# Altium PCB PMI_Alim.PcbDoc
Units mil, origin at the board's own origin, x right, y up, seen from the top; angles counter-clockwise.
Board outline 3149.61 x 1574.8 mil, 2 copper layers (Top Layer, Bottom Layer); 24 components, 13 nets, 59 pads, 9 vias.
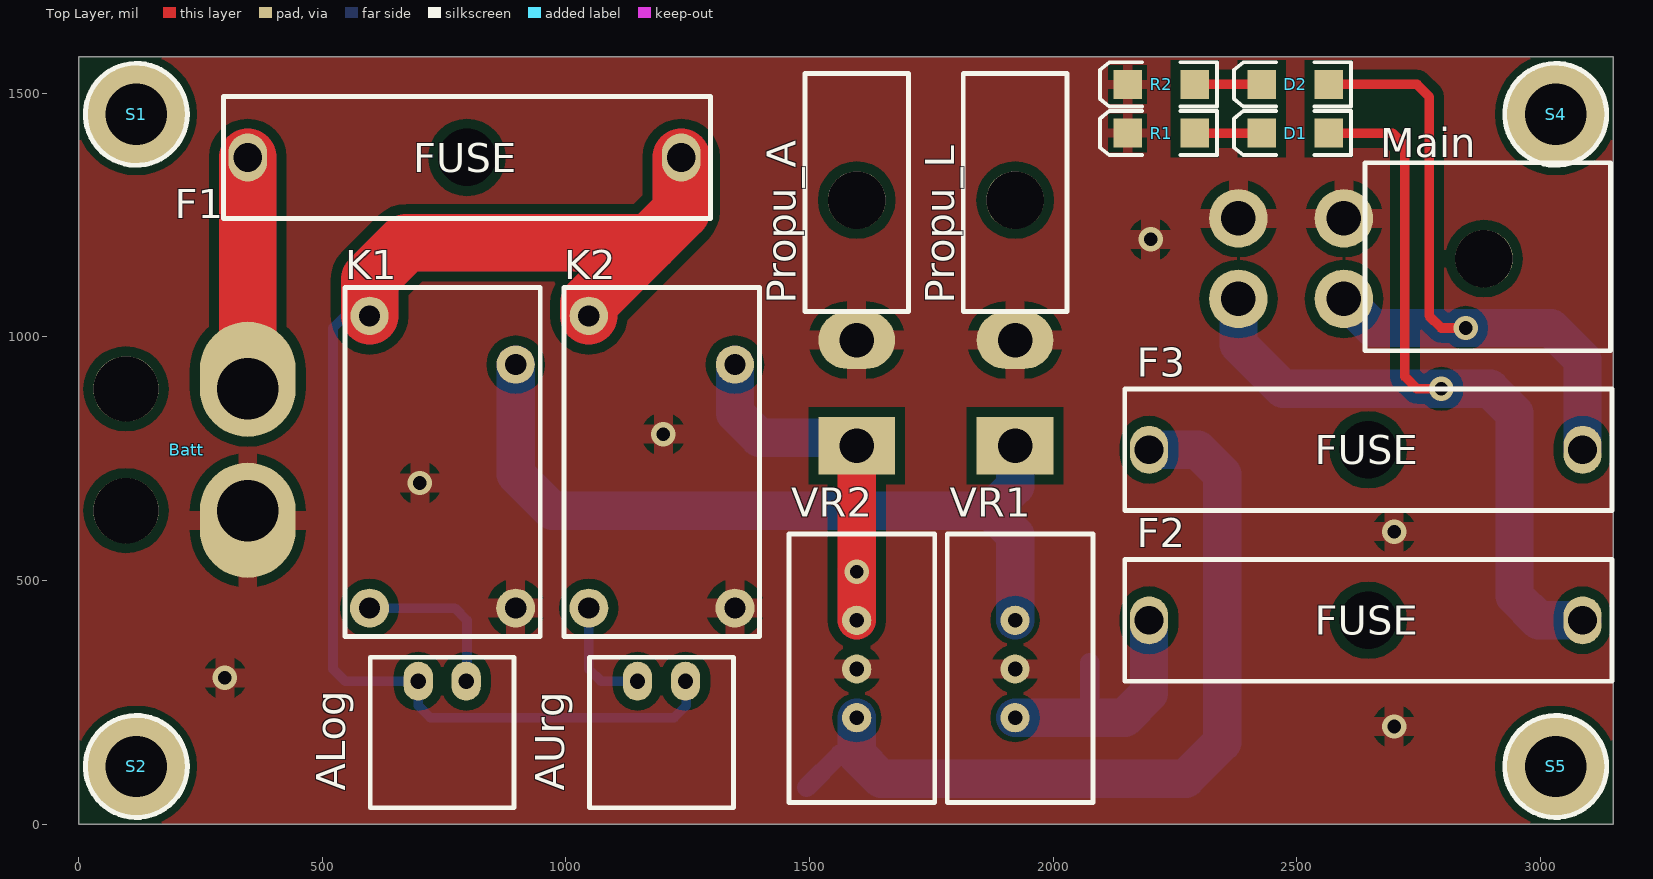
[diagram p0: Top Layer view]
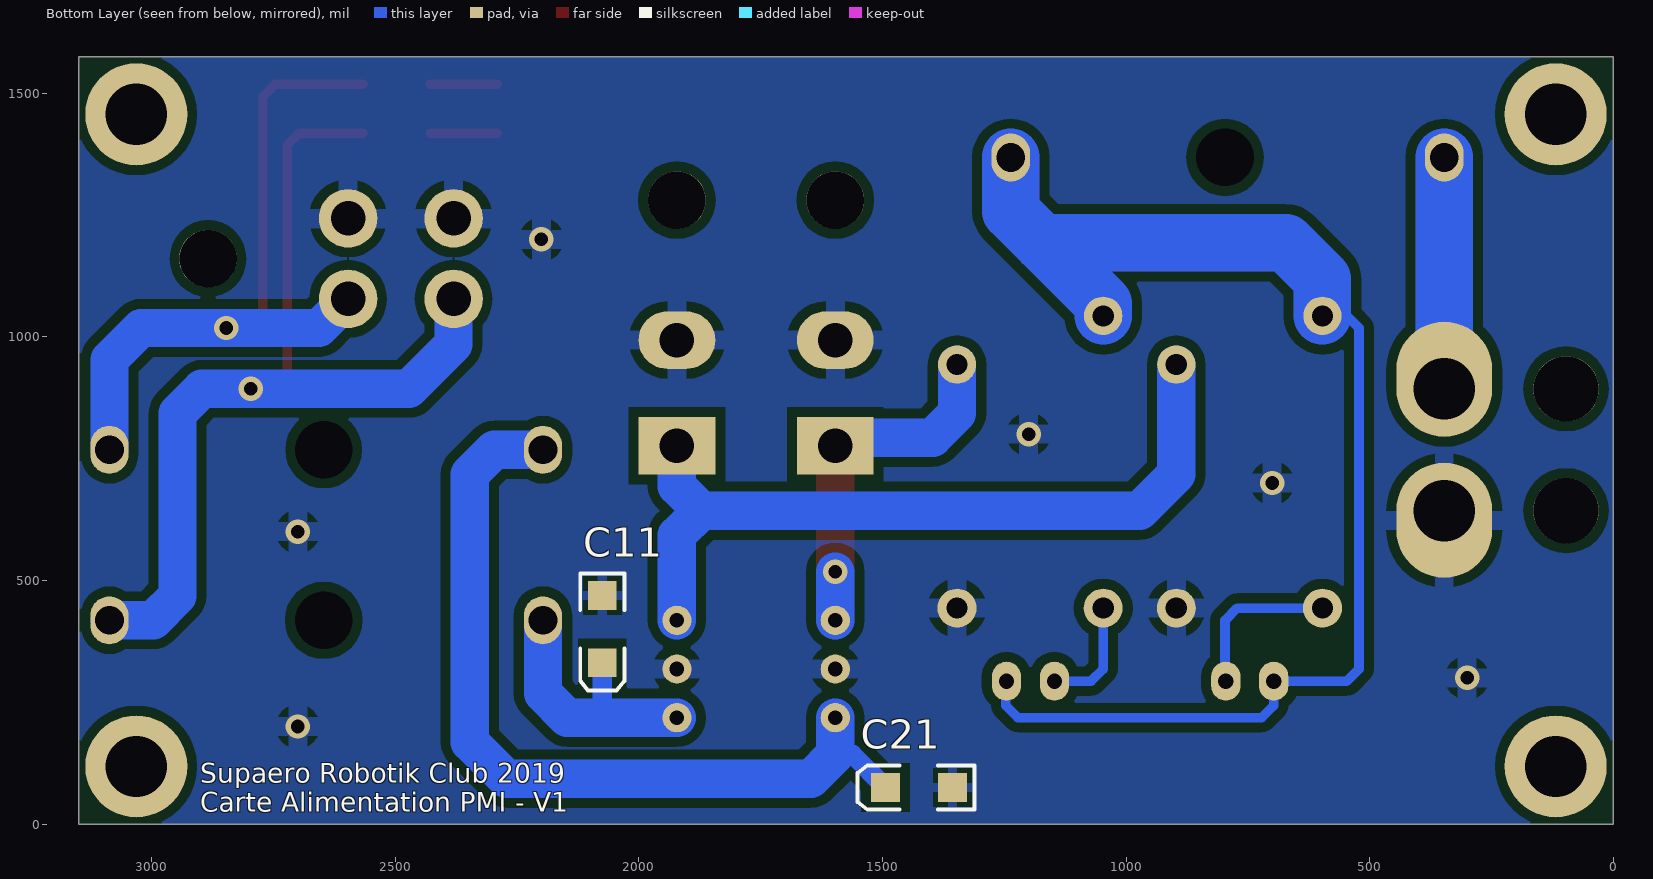
[diagram p1: Bottom Layer view, seen from below]

## Layer stack, top to bottom
Top Solder: solder mask 0.4, Solder Resist, Dk 3.5
Top Layer: signal copper 1.4
Dielectric 1: dielectric 12.6, FR-4, Dk 4.8
Bottom Layer: signal copper 1.4
Bottom Solder: solder mask 0.4, Solder Resist, Dk 3.5

## Board outline
0,0 3149.61,0 3149.61,1574.8 0,1574.8

## Design rules (kind name [scope] priority, off if disabled: settings)
Clearance [All] p1: gap=10 except(20: Arc-Poly Track-Poly SMDPad-Poly THPad-Poly Via-Poly Fill-Poly Poly-Poly Poly-Region Poly-Text)
ComponentClearance CMS_Jr [HasFootprint('MOLEX_MINIFITJR_2X2H') vs HasFootprint('3.2X1.6X1.1')] p1: gap=0 collisioncheckmode=3 verticalgap=0 showdistances=FALSE
ComponentClearance SMDLED [HasFootprint('3.2X1.6X1.1') vs HasFootprint('3.2X1.6X1.1')] p2: gap=0 collisioncheckmode=3 verticalgap=0 showdistances=FALSE
ComponentClearance [All] p3: gap=10 collisioncheckmode=3 verticalgap=10 showdistances=FALSE
PolygonConnect CMS [HasFootprint('3.2X1.6X1.1')] p1: connectstyle=Relief reliefconductorwidth=20 reliefentries=4 polygonreliefangle="90 Angle" airgapwidth=10
PolygonConnect PolygonConnect_1 [All] p2: connectstyle=Relief reliefconductorwidth=40 reliefentries=4 polygonreliefangle="90 Angle" airgapwidth=20
RoutingVias [All] p1: holewidth=28 width=50 viastyle="Through Hole" minholewidth=28 minwidth=50 maxholewidth=28 maxwidth=50
SolderMaskExpansion [All] p1: expansion=4
Width [All] p1: maxlimit=118.11 minlimit=9.84 preferedwidth=39.37
29 further rules are at their usual default settings.

## Components (designator, comment, footprint, x,y, rotation, side; value= is the part's Value field where it differs from the comment)
ALog "Header 2H" "Molex SPOX 2x1H" 696.85,293.11 r0 top
AUrg "Header 2H" "Molex SPOX 2x1H" 1146.85,293.11 r0 top
Batt "Header 2H" "Battery SALE" 346.85,643.11 r90 top
C11 "Cap" 3.2X1.6X1.1 2075,400 r270 bottom
C21 "Cap" 3.2X1.6X1.1 1425,75 r0 bottom
D1 "LED2" 3.2X1.6X1.1 2496.85,1418.11 r180 top
D2 "LED2" 3.2X1.6X1.1 2496.85,1518.11 r180 top
F1 "Fuse 1" Fuse 346.85,1368.11 r0 top
F2 "Fuse 1" Fuse 2196.85,418.11 r0 top
F3 "Fuse 1" Fuse 2196.85,768.11 r0 top
K1 "Relay-SPST" Relay 746.85,743.11 r180 top
K2 "Relay-SPST" Relay 1196.85,743.11 r180 top
Main "Header 2X2H" MOLEX_MINIFITJR_2X2H 2596.85,1243.11 r90 top
Propu_A "Header 2H" Molex_MiniFitJr_2x1H 1596.85,993.11 r90 top
Propu_L "Header 2H" Molex_MiniFitJr_2x1H 1921.85,993.11 r90 top
R1 "Res2" 3.2X1.6X1.1 2221.85,1418.11 r180 top
R2 "Res2" 3.2X1.6X1.1 2221.85,1518.11 r180 top
S1 "Screw M3" "Screw M3" 118.11,1456.69 r0 top
S2 "Screw M3" "Screw M3" 118.11,118.11 r0 top
S3 "Screw M3" "Screw M3" 6146.85,-1356.89 r0 top
S4 "Screw M3" "Screw M3" 3031.5,1456.69 r0 top
S5 "Screw M3" "Screw M3" 3031.5,118.11 r0 top
VR1 "TSR 2-2450" "TRS - centered" 1921.85,418.11 r90 top
VR2 "TSR 2-2490" "TRS - centered" 1596.85,418.11 r90 top

## Footprints (in the part's own frame and the unit in brackets; to place one, negate y for a bottom-side part, rotate by r counter-clockwise, add the part's x,y. Pads: shape width x height; smd on the part's side, far side on the other; paste and mask are expansions set on the pad)
3.2X1.6X1.1 [mm] "SMT LED; 2 Flat Leads"
  rect 1.5x1.5 smd: 1(-1.75,0) 2(1.75,0)
  silkscreen extent -2.9,-1.15 3.2,1.15
"Battery SALE" [mm] "Connecteur Batterie"
  round 3.4 hole 3.4: 0(0,6.35) 0(6.35,6.35)
  oval 6x5 hole 3.2 copper offset -0.5,0: 1(0,0)
  oval 6x5 hole 3.2 copper offset 0.5,0: 2(6.35,0)
Fuse [mm] "Porte-fusible monté sur circuit 10 (UL) A, 6.3 (VDE) A, fusible Cartouche, 893-0574"
  round 2 hole 3: 0(11.43,0)
  oval 2x2.5 hole 1.5: 1(0,0) 2(22.6,0)
  silkscreen extent -1.27,-3.17 24.13,3.17, body extent -1.27,-4.29 24.13,4.29, height 11.41
"Molex SPOX 2x1H" [mil] "Prise CI, Molex, 3 Contacts, 1 rangée, entraxe 2.5mm, 3A, Coudé, ref 22-03-5035"
  oval 60x80 hole 31.5: 1(0,0) 2(98.43,0)
  silkscreen extent -98,-260 197,49, body extent -98,-262 193,49, height 193
Molex_MiniFitJr_2x1H [mm] "Connecteur Molex 2"
  rect 3x4 hole 1.8: 1(-5.5,0)
  oval 3x4 hole 1.8: 2(0,0)
  round 3 hole 3 unplated: 3(7.3,0)
  silkscreen extent 1.5,-2.7 13.9,2.7, body extent -6.03,-2.7 13.9,3.1, height 11.01
MOLEX_MINIFITJR_2X2H [mm] "MOLEX_MINIFITJR_3X2, 39-30-1060"
  round 3.048 hole 1.8: 1(-4.2,5.5) 2(-4.2,0) 3(0,5.5) 4(0,0)
  round 3 hole 3 unplated: 10(-2.1,-7.3)
  silkscreen extent -6.9,-13.9 2.9,-1.1
Relay [mm] "SPST-NO Relay"
  round 2 hole 1.1: 1(3.81,-7.62) 2(-3.81,-5.08)
  round 2.032 hole 1.1: 3(-3.81,7.62) 4(3.81,7.62)
  silkscreen extent -5.09,-9.09 5.09,9.09, body extent -5.08,-9.14 5.08,9.14, height 15
"Screw M3" [mm] "M3 iso Screw"
  round 5.32 hole 3.2 unplated: 0(0,0)
  silkscreen extent -2.66,-2.66 2.66,2.66
"TRS - centered" [mil]
  round 60 hole 30: 1(0,0) 2(-100,0) 3(-200,0)
  silkscreen extent -374,-160 177,139, body extent -374,-157 177,138, height 398

## Part data
ALog AUrg Batt Propu_A Propu_L: "Header, 2-Pin, Right Angle"
C11 C21: "Capacitor"
D1 D2: "Typical RED, GREEN, YELLOW, AMBER GaAs LED"
F1 F2 F3: "Fuse"
K1 K2: "Single-Pole Single-Throw Relay"
Main: "Header, 2-Pin, Dual row, Right Angle"
R1 R2: "Resistor"
VR1 VR2: library part "Volt Reg", "Voltage Regulator"

## Via types
v1: diameter 50, hole 28, Top Layer to Bottom Layer, 9 vias

## Nets (pads, with @x,y where several pads share a name; then routed paths per layer and width w, separated by ;. In a path a pad name is that pad's centre, name@x,y a point inside that pad or via, vN(x,y) a via of type N, cw(c..) or ccw(c..) an arc to the next point about the centre after c; other vN are vias at no path point)
5V_L: D1.1 F2.2 Main.1 | length 1980.6
  Top Layer w19.68: D1.1 2696.85,1418.11 2721.85,1393.11 2721.85,918.11 2746.85,893.11 v1(2796.85,893.11)
  Bottom Layer w78.74: Main.1 2380.31,984.65 2471.85,893.11 2896.85,893.11 2946.85,843.11 2946.85,468.11 2996.85,418.11 F2.2
9V_A: D2.1 F3.2 Main.2 | length 1478.3
  Top Layer w19.68: D2.1 2746.85,1518.11 2771.85,1493.11 2771.85,1043.11 2796.85,1018.11 v1(2846.85,1018.11)
  Bottom Layer w78.74: Main.2 2656.5,1018.11 3021.85,1018.11 3086.61,953.35 F3.2
GND: Batt.1 C11.1 C21.1 K1.3 K2.3 Main.3 Main.4 Propu_A.2 Propu_L.2 R1.2 R2.2 VR1.2 VR2.2
  other v1: 2700,200 300,300 2700,600 700,700 1200,800 2200,1200
NetALog_2: ALog.2 K1.4 | length 333.8
  Bottom Layer w19.68: K1.4 771.85,443.11 796.85,418.11 ALog.2@796.85,294.68
NetAUrg_1: AUrg.1 K2.4 | length 235.4
  Bottom Layer w19.68: K2.4 1046.85,318.11 1071.85,293.11 AUrg.1
NetC11_2: C11.2 F2.1 VR1.3 | length 604.7
  Bottom Layer w39.37: 2025,218.11 2068.11,218.11 2075,225 C11.2
  Bottom Layer w78.74: VR1.3 2025,218.11 2146.85,218.11 2196.85,268.11 F2.1
NetC21_2: C21.2 F3.1 VR2.3 | length 1728.7
  Bottom Layer w39.37: C21.2 1562.01,143.11 1596.85,143.11
  Bottom Layer w78.74: VR2.3 1596.85,143.11 1646.85,93.11 2271.85,93.11 2346.85,168.11 2346.85,718.11 2296.85,768.11 F3.1
NetD1_2: D1.2 R1.1 | length 137.2
  Top Layer w19.68: R1.1 D1.2
NetD2_2: D2.2 R2.1 | length 137.2
  Top Layer w19.68: R2.1 D2.2
V_BAT: Batt.2 F1.1 | length 950
  Top Layer w118.11: Batt.2 F1.1
  Bottom Layer w118.11: Batt.2 F1.1
V_BATA: K2.2 Propu_A.1 VR2.1 | length 836
  Top Layer w78.74: VR2.1 v1(1596.85,518.11) Propu_A.1
  Bottom Layer w78.74: K2.2 1346.85,843.11 1396.85,793.11 1580.31,793.11 Propu_A.1 ; VR2.1 v1(1596.85,518.11)
V_BATL: K1.2 Propu_L.1 VR1.1 | length 1631
  Bottom Layer w78.74: K1.2 896.85,718.11 971.85,643.11 1871.85,643.11 ; VR1.1 1921.85,593.11 1871.85,643.11 ; Propu_L.1 1921.85,693.11 1871.85,643.11
V_BATP: ALog.1 AUrg.2 F1.2 K1.1 K2.1 | length 3809.2
  Top Layer w118.11: K1.1 596.85,1118.11 671.85,1193.11 1171.85,1193.11 ; K2.1 1046.85,1068.11 1171.85,1193.11 ; F1.2 1236.61,1257.87 1171.85,1193.11
  Bottom Layer w19.68: K1.1 546.85,1043.11 521.85,1018.11 521.85,318.11 546.85,293.11 ALog.1 696.85,243.11 721.85,218.11 1221.85,218.11 1246.85,243.11 AUrg.2@1246.85,291.54
  Bottom Layer w118.11: K1.1 596.85,1118.11 671.85,1193.11 1171.85,1193.11 ; K2.1 1046.85,1068.11 1171.85,1193.11 ; F1.2 1236.61,1257.87 1171.85,1193.11
pads on no net: Batt.0 F1.0 F2.0 F3.0 Main.10 Propu_A.3 Propu_L.3 S1.0 S2.0 S3.0 S4.0 S5.0

## Polygon pours and split planes (outlines as drawn)
GND on Top Layer "Top GND" (solid, remove dead copper, pour order 0): 0,1574.8 3149.61,1574.8 3149.61,0 0,0
GND on Bottom Layer "Bop GND" (solid, remove dead copper, pour order 2): 0,1574.8 3149.61,1574.8 3149.61,0 0,0

## Silkscreen, mask and mechanical layers (free items; w line width, h text height)
Bottom Overlay:
  text "Supaero Robotik Club 2019 / Carte Alimentation PMI - V1" at 2900,25 h40
Mechanical 2:
  the board outline again, w10

## Dimensions
0,0 to 3149.61,0 on Mechanical 3
0,1574.8 to 0,0 on Mechanical 3

## Text inside footprints (layer, text, board x,y; h text height)
F1: Top Overlay "FUSE" at 686.85,1338.11 h60
F2: Top Overlay "FUSE" at 2536.85,388.11 h60
F3: Top Overlay "FUSE" at 2536.85,738.11 h60